# Altium PCB PCB_V1.0.PcbDoc (part 2 of 3)
Units mil, origin at the board's own origin, x right, y up, seen from the top; angles counter-clockwise.
Board outline 2770.03 x 1450.03 mil, 4 copper layers (Layer 1(SIG), Layer 2(GND), Layer 3(GND), Layer 4(SIG)), stack 61.581 mil thick; 51 components, 42 nets, 232 pads, 371 vias.
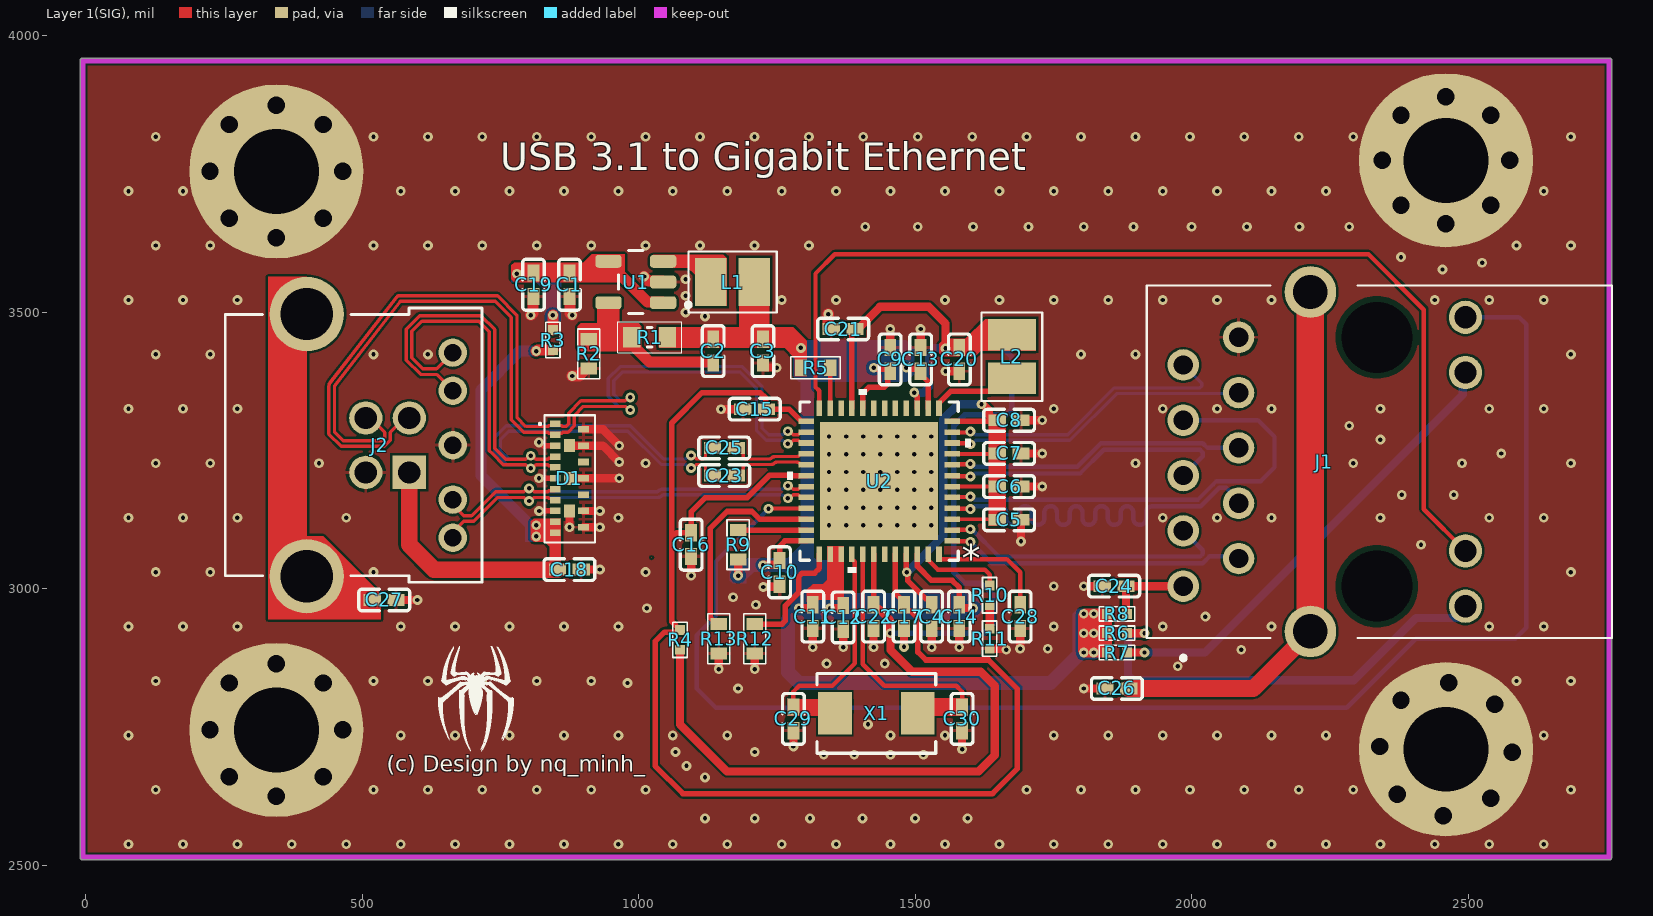
[diagram p0: Layer 1(SIG) view]

## Part data (continued)
R1: library part R0603_53.6kΩ_±0.5%, "Fixed Resistor, Thin Film, 0.1W, 53600ohm, 75V, 0.5% +/-Tol, 50ppm/Cel, Surface Mount, 0603", Case Code (Imperial)=0603, LCSC Part=C863153, Manufacturer="Yageo Group", Manufacturer Part Number=RT0603DRE0753K6L, Max Operating Temperature=155°C, Max Power Dissipation=100mW, Min Operating Temperature=-55°C, Supplier Part Number=311-2618-1-ND, Temperature Coefficient=50ppm/°C, Tolerance=0.5%, Voltage Rating=75V, Voltage Rating (DC)=50V, Case/Package=0603, Category="Chip SMD Resistors", China RoHS=Non-Compliant, ComponentLink1Description=https://datasheet.octopart.com:443/RT0603DRE0753K6L-Yageo-datasheet-176402239.pdf?src-supplier=Future+Electronics, ComponentLink1URL=https://datasheet.octopart.com:443/RT0603DRE0753K6L-Yageo-datasheet-176402239.pdf?src-supplier=Future+Electronics, ComponentLink2Description=https://datasheet.octopart.com:443/RT0603DRE0753K6L-Yageo-datasheet-169971040.pdf?src-supplier=Future+Electronics, ComponentLink2URL=https://datasheet.octopart.com:443/RT0603DRE0753K6L-Yageo-datasheet-169971040.pdf?src-supplier=Future+Electronics, ComponentLink3Description=https://datasheet.octopart.com:443/RT0603DRE0753K6L-Yageo-datasheet-166250672.pdf?src-supplier=Future+Electronics, ComponentLink3URL=https://datasheet.octopart.com:443/RT0603DRE0753K6L-Yageo-datasheet-166250672.pdf?src-supplier=Future+Electronics, ComponentLink4Description=https://datasheet.octopart.com:443/RT0603DRE0753K6L-Yageo-datasheet-136673517.pdf?src-supplier=Future+Electronics, ComponentLink4URL=https://datasheet.octopart.com:443/RT0603DRE0753K6L-Yageo-datasheet-136673517.pdf?src-supplier=Future+Electronics, ComponentLink5Description=https://datasheet.octopart.com:443/RT0603DRE0753K6L-Yageo-datasheet-137700930.pdf?src-supplier=Future+Electronics, ComponentLink5URL=https://datasheet.octopart.com:443/RT0603DRE0753K6L-Yageo-datasheet-137700930.pdf?src-supplier=Future+Electronics, ComponentLink6Description=https://datasheet.octopart.com:443/RT0603DRE0753K6L-Yageo-datasheet-96443642.pdf?src-supplier=Upverter, ComponentLink6URL=https://datasheet.octopart.com:443/RT0603DRE0753K6L-Yageo-datasheet-96443642.pdf?src-supplier=Upverter, ComponentLink7Description=https://datasheet.octopart.com/RT0603DRE0753K6L-Yageo-datasheet-86813807.pdf, ComponentLink7URL=https://datasheet.octopart.com/RT0603DRE0753K6L-Yageo-datasheet-86813807.pdf, ComponentLink8Description=http://sigma.octopart.com:80/rohs_statement/Yageo-company-2.pdf?src-supplier=Compliance+Statements, ComponentLink8URL=http://sigma.octopart.com:80/rohs_statement/Yageo-company-2.pdf?src-supplier=Compliance+Statements, ComponentLink9Description=http://sigma.octopart.com:80/conflict_mineral_statement/Yageo-company-3.pdf?src-supplier=Compliance+Statements, ComponentLink9URL=http://sigma.octopart.com:80/conflict_mineral_statement/Yageo-company-3.pdf?src-supplier=Compliance+Statements, Composition="Thin Film", Country of Origin="Mainland China, Taiwan", Export Control Classification Number (ECCN) Code=EAR99, Features="Moisture Resistant", Harmonized Tariff Schedule (HTS) Code=8533.21.00.30, Height=450µm, Introduction Date=2008-07-11, Lead Free="Lead Free", Length=1.6mm, Lifecycle Status=Production, Mounting Technology="Surface Mount", Number of Terminals=2, Number of Terminations=2, Packaging="Tape & Reel (TR)", Power Rating=100mW, Pricing="1=0,1, 10=0,02, 25=0,0192, 50=0,018, 100=0,0171, 250=0,01584, 500=0,01496, 1000=0,01415 (USD)", REACH SVHC=Yes, RoHS=Compliant, Schedule B=8533210045, Stock=20044, Supplier=DigiKey, Width=800µm, Working Voltage=75V
R2 R5 R9 R12 R13: library part R0603_12kΩ_±1%, "100mW Thick Film Resistors 75V ±100ppm/℃ ±1% 12kΩ 0603 Chip Resistor - Surface Mount ROHS", Case Code (Imperial)=0603, Case Code (Metric)=1608, LCSC Part=C114659, Manufacturer="Yageo Group", Manufacturer Part Number=RC0603FR-0712KL, Max Operating Temperature=155°C, Max Power Dissipation=100mW, Min Operating Temperature=-55°C, Supplier Part Number=311-12.0KHRCT-ND, Temperature Coefficient=100ppm/°C, Tolerance=1%, Voltage Rating=50V, Working Voltage=75V, Case/Package=0603, Category="Chip SMD Resistors", China RoHS=Non-Compliant, ComponentLink1Description=https://datasheet.octopart.com:443/RC0603FR-0712KL-Yageo-datasheet-175887523.pdf?src-supplier=IHS, ComponentLink1URL=https://datasheet.octopart.com:443/RC0603FR-0712KL-Yageo-datasheet-175887523.pdf?src-supplier=IHS, ComponentLink2Description=https://datasheet.octopart.com:443/RC0603FR-0712KL-Yageo-datasheet-8328172.pdf?src-supplier=Newark, ComponentLink2URL=https://datasheet.octopart.com:443/RC0603FR-0712KL-Yageo-datasheet-8328172.pdf?src-supplier=Newark, ComponentLink3Description=https://datasheet.octopart.com:443/RC0603FR-0712KL-Yageo-datasheet-175423674.pdf?src-supplier=Newark, ComponentLink3URL=https://datasheet.octopart.com:443/RC0603FR-0712KL-Yageo-datasheet-175423674.pdf?src-supplier=Newark, ComponentLink4Description=https://datasheet.octopart.com:443/RC0603FR-0712KL-Yageo-datasheet-34211833.pdf?src-supplier=Newark, ComponentLink4URL=https://datasheet.octopart.com:443/RC0603FR-0712KL-Yageo-datasheet-34211833.pdf?src-supplier=Newark, ComponentLink5Description=https://datasheet.octopart.com:443/RC0603FR-0712KL-Yageo-datasheet-62067350.pdf?src-supplier=element14+APAC, ComponentLink5URL=https://datasheet.octopart.com:443/RC0603FR-0712KL-Yageo-datasheet-62067350.pdf?src-supplier=element14+APAC, ComponentLink6Description=https://datasheet.octopart.com:443/RC0603FR-0712KL-Yageo-datasheet-103092701.pdf?src-supplier=Upverter, ComponentLink6URL=https://datasheet.octopart.com:443/RC0603FR-0712KL-Yageo-datasheet-103092701.pdf?src-supplier=Upverter, ComponentLink7Description=https://datasheet.octopart.com:443/RC0603FR-0712KL-Yageo-datasheet-141435368.pdf?src-supplier=Upverter, ComponentLink7URL=https://datasheet.octopart.com:443/RC0603FR-0712KL-Yageo-datasheet-141435368.pdf?src-supplier=Upverter, ComponentLink8Description=https://datasheet.octopart.com:443/RC0603FR-0712KL-Yageo-Group-datasheet-190305687.pdf?src-supplier=Future+Electronics, ComponentLink8URL=https://datasheet.octopart.com:443/RC0603FR-0712KL-Yageo-Group-datasheet-190305687.pdf?src-supplier=Future+Electronics, ComponentLink9Description=https://datasheet.octopart.com:443/RC0603FR-0712KL-Yageo-datasheet-164759695.pdf?src-supplier=Future+Electronics, ComponentLink9URL=https://datasheet.octopart.com:443/RC0603FR-0712KL-Yageo-datasheet-164759695.pdf?src-supplier=Future+Electronics, ComponentLink10Description=https://datasheet.octopart.com:443/RC0603FR-0712KL-Yageo-datasheet-137700087.pdf?src-supplier=Future+Electronics, ComponentLink10URL=https://datasheet.octopart.com:443/RC0603FR-0712KL-Yageo-datasheet-137700087.pdf?src-supplier=Future+Electronics, ComponentLink11Description=https://datasheet.octopart.com:443/RC0603FR0712KL-Yageo-datasheet-27584510.pdf?src-supplier=Future+Electronics, ComponentLink11URL=https://datasheet.octopart.com:443/RC0603FR0712KL-Yageo-datasheet-27584510.pdf?src-supplier=Future+Electronics, ComponentLink12Description=https://datasheet.octopart.com:443/RC0603FR-0712KL-Yageo-datasheet-15599030.pdf?src-supplier=Future+Electronics, ComponentLink12URL=https://datasheet.octopart.com:443/RC0603FR-0712KL-Yageo-datasheet-15599030.pdf?src-supplier=Future+Electronics, ComponentLink13Description=https://datasheet.octopart.com:443/RC0603FR-0712KL-Yageo-datasheet-12596169.pdf?src-supplier=Future+Electronics, ComponentLink13URL=https://datasheet.octopart.com:443/RC0603FR-0712KL-Yageo-datasheet-12596169.pdf?src-supplier=Future+Electronics, ComponentLink14Description=https://datasheet.octopart.com:443/RC0603FR-0712KL-Yageo-datasheet-8324193.pdf?src-supplier=Future+Electronics, ComponentLink14URL=https://datasheet.octopart.com:443/RC0603FR-0712KL-Yageo-datasheet-8324193.pdf?src-supplier=Future+Electronics, ComponentLink15Description=https://datasheet.octopart.com:443/RC0603FR-0712KL-Yageo-Group-datasheet-189192902.pdf?src-supplier=LCSC, ComponentLink15URL=https://datasheet.octopart.com:443/RC0603FR-0712KL-Yageo-Group-datasheet-189192902.pdf?src-supplier=LCSC, ComponentLink16Description=https://datasheet.octopart.com:443/RC0603FR-0712KL-Yageo-Group-datasheet-176638170.pdf?src-supplier=Farnell, ComponentLink16URL=https://datasheet.octopart.com:443/RC0603FR-0712KL-Yageo-Group-datasheet-176638170.pdf?src-supplier=Farnell, ComponentLink17Description=https://datasheet.octopart.com/RC0603FR-0712KL-Yageo-datasheet-73766026.pdf, ComponentLink17URL=https://datasheet.octopart.com/RC0603FR-0712KL-Yageo-datasheet-73766026.pdf, ComponentLink18Description=https://datasheet.octopart.com:443/RC0603FR-0712KL-Yageo-datasheet-30459151.pdf?src-supplier=Seeed+Studio, ComponentLink18URL=https://datasheet.octopart.com:443/RC0603FR-0712KL-Yageo-datasheet-30459151.pdf?src-supplier=Seeed+Studio, ComponentLink19Description=https://datasheet.octopart.com:443/RC0603FR-0712KL-Yageo-datasheet-118562.pdf?src-supplier=DigiKey, ComponentLink19URL=https://datasheet.octopart.com:443/RC0603FR-0712KL-Yageo-datasheet-118562.pdf?src-supplier=DigiKey, ComponentLink20Description=http://sigma.octopart.com:80/conflict_mineral_statement/Yageo-company-3.pdf?src-supplier=Compliance+Statements, ComponentLink20URL=http://sigma.octopart.com:80/conflict_mineral_statement/Yageo-company-3.pdf?src-supplier=Compliance+Statements, ComponentLink21Description=http://sigma.octopart.com:80/rohs_statement/Yageo-company-2.pdf?src-supplier=Compliance+Statements, ComponentLink21URL=http://sigma.octopart.com:80/rohs_statement/Yageo-company-2.pdf?src-supplier=Compliance+Statements, Composition="Thick Film", Depth=800µm, Features="Moisture Resistant", Height=450µm, Lead Free="Lead Free", Length=1.6mm, Lifecycle Status=Production, Military Standard=Not, Mounting Technology="Surface Mount", Number of Terminals=2, Number of Terminations=2, Packaging="Tape and Reel", Pins=2, Power Rating=100mW, Pricing="1=0,1, 10=0,025, 25=0,0188, 50=0,015, 100=0,0122, 250=0,0094, 500=0,00782, 1000=0,00661 (USD)", REACH SVHC=Yes, RoHS=Compliant, Schedule B="8533210045, 8533210045|8533210045|8533210045|8533210045|8533210045", Stock=279862, Supplier=DigiKey, Termination=SMD/SMT, Voltage Rating (DC)=50V, Width=800µm
R3 R4 R8: library part RC0402JR-070RL, "GENERAL PURPOSE CHIP RESISTOR Metal Glaze/thick Film, 0.0625W, 0ohm, Surface Mount, 0402", Case Code (Imperial)=0402, LCSC Part=C60485, Manufacturer="Yageo Group", Max Operating Temperature=155°C, Max Power Dissipation=63mW, Min Operating Temperature=-55°C, Power Rating=62.5mW, Supplier Part Number=311-0.0JRDKR-ND, Temperature Coefficient=200ppm/°C, Tolerance=5%, Voltage Rating=50V, Case/Package=0402, Category="Chip SMD Resistors", China RoHS=Non-Compliant, ComponentLink1Description=https://datasheet.octopart.com:443/RC0402JR-070RL-Yageo-datasheet-182189538.pdf?src-supplier=IHS, ComponentLink1URL=https://datasheet.octopart.com:443/RC0402JR-070RL-Yageo-datasheet-182189538.pdf?src-supplier=IHS, ComponentLink2Description=https://datasheet.octopart.com:443/RC0402JR-070RL-Yageo-datasheet-10408619.pdf?src-supplier=Newark, ComponentLink2URL=https://datasheet.octopart.com:443/RC0402JR-070RL-Yageo-datasheet-10408619.pdf?src-supplier=Newark, ComponentLink3Description=https://datasheet.octopart.com:443/RC0402JR-070RL-Yageo-Group-datasheet-181964826.pdf?src-supplier=Newark, ComponentLink3URL=https://datasheet.octopart.com:443/RC0402JR-070RL-Yageo-Group-datasheet-181964826.pdf?src-supplier=Newark, ComponentLink4Description=https://datasheet.octopart.com:443/RC0402JR-070RL-Yageo-Group-datasheet-190305687.pdf?src-supplier=Future+Electronics, ComponentLink4URL=https://datasheet.octopart.com:443/RC0402JR-070RL-Yageo-Group-datasheet-190305687.pdf?src-supplier=Future+Electronics, ComponentLink5Description=https://datasheet.octopart.com:443/RC0402JR-070RL-Yageo-datasheet-164759695.pdf?src-supplier=Future+Electronics, ComponentLink5URL=https://datasheet.octopart.com:443/RC0402JR-070RL-Yageo-datasheet-164759695.pdf?src-supplier=Future+Electronics, ComponentLink6Description=https://datasheet.octopart.com:443/RC0402JR-070RL-Yageo-datasheet-137700087.pdf?src-supplier=Future+Electronics, ComponentLink6URL=https://datasheet.octopart.com:443/RC0402JR-070RL-Yageo-datasheet-137700087.pdf?src-supplier=Future+Electronics, ComponentLink7Description=https://datasheet.octopart.com:443/RC0402JR-070RL-Yageo-datasheet-12531192.pdf?src-supplier=Seeed+Studio, ComponentLink7URL=https://datasheet.octopart.com:443/RC0402JR-070RL-Yageo-datasheet-12531192.pdf?src-supplier=Seeed+Studio, ComponentLink8Description=https://datasheet.octopart.com:443/RC0402JR-070RL-Yageo-datasheet-8324527.pdf?src-supplier=TME, ComponentLink8URL=https://datasheet.octopart.com:443/RC0402JR-070RL-Yageo-datasheet-8324527.pdf?src-supplier=TME, ComponentLink9Description=https://datasheet.octopart.com:443/RC0402JR-070RL-Yageo-datasheet-62067350.pdf?src-supplier=Farnell, ComponentLink9URL=https://datasheet.octopart.com:443/RC0402JR-070RL-Yageo-datasheet-62067350.pdf?src-supplier=Farnell, ComponentLink10Description=https://datasheet.octopart.com:443/RC0402JR-070RL-Yageo-datasheet-8329306.pdf?src-supplier=element14, ComponentLink10URL=https://datasheet.octopart.com:443/RC0402JR-070RL-Yageo-datasheet-8329306.pdf?src-supplier=element14, ComponentLink11Description=https://datasheet.octopart.com:443/RC0402JR-070RL-Yageo-datasheet-505231.pdf?src-supplier=element14, ComponentLink11URL=https://datasheet.octopart.com:443/RC0402JR-070RL-Yageo-datasheet-505231.pdf?src-supplier=element14, ComponentLink12Description=https://datasheet.octopart.com:443/RC0402JR-070RL-Yageo-datasheet-175423674.pdf?src-supplier=SOS+electronic, ComponentLink12URL=https://datasheet.octopart.com:443/RC0402JR-070RL-Yageo-datasheet-175423674.pdf?src-supplier=SOS+electronic, ComponentLink13Description=https://datasheet.octopart.com/RC0402JR-070RL-Yageo-datasheet-73766026.pdf, ComponentLink13URL=https://datasheet.octopart.com/RC0402JR-070RL-Yageo-datasheet-73766026.pdf, ComponentLink14Description=http://sigma.octopart.com:80/conflict_mineral_statement/Yageo-company-3.pdf?src-supplier=Compliance+Statements, ComponentLink14URL=http://sigma.octopart.com:80/conflict_mineral_statement/Yageo-company-3.pdf?src-supplier=Compliance+Statements, ComponentLink15Description=http://sigma.octopart.com:80/rohs_statement/Yageo-company-2.pdf?src-supplier=Compliance+Statements, ComponentLink15URL=http://sigma.octopart.com:80/rohs_statement/Yageo-company-2.pdf?src-supplier=Compliance+Statements, Composition="Thick Film", Contact Plating=Tin, Depth=500µm, Features="Moisture Resistant", Height=350µm, Lead Free="Lead Free", Length=1mm, Lifecycle Status=Production, Manufacturer Part Number=RC0402JR-070RL, Military Standard=Not, Mounting Technology="Surface Mount", Number of Terminals=2, Number of Terminations=2, Packaging="Tape & Reel", Pins=2, Pricing="1=0,1, 10=0,010, 25=0,0064, 50=0,0056, 100=0,0048, 250=0,00404, 500=0,00356, 1000=0,00313, 5000=0,00237 (USD)", Radiation Hardening=No, REACH SVHC=Yes, RoHS=Compliant, Schedule B="8533290000, 8533290000|8533290000, 8533290000|8533290000|8533290000, 8533290000|8533290000|8533290000|8533290000", Stock=16568824, Supplier=DigiKey, Termination=SMD/SMT, Voltage Rating (DC)=50V, Width=500µm
R6 R7 R10 R11: library part R0402_1kΩ_0.1%, "RES SMD 1K OHM 0.1% 1/16W 0402 / 1 kOhms ±0.1% 0.063W, 1/16W Chip Resistor 0402 (1005 Metric) Thin Film", Case Code (Imperial)=0402, LCSC Part=C852624, Manufacturer="Yageo Group", Manufacturer Part Number=RT0402BRD071KL, Max Operating Temperature=155°C, Max Power Dissipation=63mW, Min Operating Temperature=-55°C, Power Rating=62.5mW, Supplier Part Number=YAG1386CT-ND, Temperature Coefficient=25ppm/°C, Tolerance=0.1%, Voltage Rating=50V, Case/Package=0402, Category="Chip SMD Resistors", China RoHS=Non-Compliant, ComponentLink1Description=https://datasheet.octopart.com:443/RT0402BRD071KL-Yageo-datasheet-176402239.pdf?src-supplier=Future+Electronics, ComponentLink1URL=https://datasheet.octopart.com:443/RT0402BRD071KL-Yageo-datasheet-176402239.pdf?src-supplier=Future+Electronics, ComponentLink2Description=https://datasheet.octopart.com:443/RT0402BRD071KL-Yageo-datasheet-169971040.pdf?src-supplier=Future+Electronics, ComponentLink2URL=https://datasheet.octopart.com:443/RT0402BRD071KL-Yageo-datasheet-169971040.pdf?src-supplier=Future+Electronics, ComponentLink3Description=https://datasheet.octopart.com:443/RT0402BRD071KL-Yageo-datasheet-166250672.pdf?src-supplier=Future+Electronics, ComponentLink3URL=https://datasheet.octopart.com:443/RT0402BRD071KL-Yageo-datasheet-166250672.pdf?src-supplier=Future+Electronics, ComponentLink4Description=https://datasheet.octopart.com:443/RT0402BRD071KL-Yageo-datasheet-136673517.pdf?src-supplier=Future+Electronics, ComponentLink4URL=https://datasheet.octopart.com:443/RT0402BRD071KL-Yageo-datasheet-136673517.pdf?src-supplier=Future+Electronics, ComponentLink5Description=https://datasheet.octopart.com:443/RT0402BRD071KL-Yageo-datasheet-137700930.pdf?src-supplier=Future+Electronics, ComponentLink5URL=https://datasheet.octopart.com:443/RT0402BRD071KL-Yageo-datasheet-137700930.pdf?src-supplier=Future+Electronics, ComponentLink6Description=https://datasheet.octopart.com:443/RT0402BRD071KL-Yageo-datasheet-96443642.pdf?src-supplier=Future+Electronics, ComponentLink6URL=https://datasheet.octopart.com:443/RT0402BRD071KL-Yageo-datasheet-96443642.pdf?src-supplier=Future+Electronics, ComponentLink7Description=https://datasheet.octopart.com:443/RT0402BRD071KL-Yageo-datasheet-12594463.pdf?src-supplier=Future+Electronics, ComponentLink7URL=https://datasheet.octopart.com:443/RT0402BRD071KL-Yageo-datasheet-12594463.pdf?src-supplier=Future+Electronics, ComponentLink8Description=https://datasheet.octopart.com:443/RT0402BRD071KL-Yageo-datasheet-8324589.pdf?src-supplier=Future+Electronics, ComponentLink8URL=https://datasheet.octopart.com:443/RT0402BRD071KL-Yageo-datasheet-8324589.pdf?src-supplier=Future+Electronics, ComponentLink9Description=https://datasheet.octopart.com:443/RT0402BRD071KL-Yageo-datasheet-34924148.pdf?src-supplier=Future+Electronics, ComponentLink9URL=https://datasheet.octopart.com:443/RT0402BRD071KL-Yageo-datasheet-34924148.pdf?src-supplier=Future+Electronics, ComponentLink10Description=https://datasheet.octopart.com:443/RT0402BRD071KL-Yageo-datasheet-141265893.pdf?src-supplier=ODG+(Origin+Data+Global), ComponentLink10URL=https://datasheet.octopart.com:443/RT0402BRD071KL-Yageo-datasheet-141265893.pdf?src-supplier=ODG+(Origin+Data+Global), ComponentLink11Description=https://sigma.octopart.com:443/138820526/technical_drawing/Yageo-RT0402BRD071KL.pdf?src-supplier=Upverter, ComponentLink11URL=https://sigma.octopart.com:443/138820526/technical_drawing/Yageo-RT0402BRD071KL.pdf?src-supplier=Upverter, ComponentLink12Description=https://datasheet.octopart.com:443/RT0402BRD071KL-Yageo-datasheet-10915759.pdf?src-supplier=TME, ComponentLink12URL=https://datasheet.octopart.com:443/RT0402BRD071KL-Yageo-datasheet-10915759.pdf?src-supplier=TME, ComponentLink13Description=https://datasheet.octopart.com:443/RT0402BRD071KL-Yageo-datasheet-164439670.pdf?src-supplier=Newark, ComponentLink13URL=https://datasheet.octopart.com:443/RT0402BRD071KL-Yageo-datasheet-164439670.pdf?src-supplier=Newark, ComponentLink14Description=https://datasheet.octopart.com:443/RT0402BRD071KL-Yageo-datasheet-120102479.pdf?src-supplier=Megastar, ComponentLink14URL=https://datasheet.octopart.com:443/RT0402BRD071KL-Yageo-datasheet-120102479.pdf?src-supplier=Megastar, ComponentLink15Description=https://datasheet.octopart.com/RT0402BRD071KL-Yageo-datasheet-86813807.pdf, ComponentLink15URL=https://datasheet.octopart.com/RT0402BRD071KL-Yageo-datasheet-86813807.pdf, ComponentLink16Description=http://sigma.octopart.com:80/conflict_mineral_statement/Yageo-company-3.pdf?src-supplier=Compliance+Statements, ComponentLink16URL=http://sigma.octopart.com:80/conflict_mineral_statement/Yageo-company-3.pdf?src-supplier=Compliance+Statements, ComponentLink17Description=http://sigma.octopart.com:80/rohs_statement/Yageo-company-2.pdf?src-supplier=Compliance+Statements, ComponentLink17URL=http://sigma.octopart.com:80/rohs_statement/Yageo-company-2.pdf?src-supplier=Compliance+Statements, Composition="Thin Film", Depth=500µm, Features="Moisture Resistant", Height=300µm, Lead Free="Lead Free", Length=1mm, Lifecycle Status=Production, Military Standard=Not, Mounting Technology="Surface Mount", Number of Terminals=2, Number of Terminations=2, Pricing="1=0,1, 10=0,078, 25=0,0724, 50=0,0684, 100=0,0646, 250=0,05992, 500=0,05672, 1000=0,05377, 5000=0,04796 (USD)", REACH SVHC=Yes, RoHS=Compliant, Schedule B="8533210045, 8533210045|8533210045|8533210045|8533210045|8533210045|8533210045|8533210045|8533210045|8533210045|8533210045|8533210045|8533210045|8533210045, 8533210045|8533210045|8533210045|8533210045|8533210045|8533210045|8533210045|8533210045|8533210045|8533210045|8533210045|8533210045|8533210045|8533210045, 8533210045|8533210045|8533210045|8533210045|8533210045|8533210045|8533210045|8533210045|8533210045|8533210045|8533210045|8533210045|8533210045|8533210045|8533210045", Stock=101139, Supplier=DigiKey, Termination=SMD/SMT, Voltage Rating (DC)=50V, Weight=652.039032µg, Width=500µm, Working Voltage=50V
U1: "ROHS3Compliant Adjustable Positive DUAL Switching Regulator IC -40C~125C TJ 1.5MHz 1A 1.6mm", Case/Package=SOT-23, LCSC Part=C163219, Manufacturer="Texas Instruments", Manufacturer Lifecycle Status=ACTIVE, Max Junction Temperature (Tj)=125°C, Max Supply Voltage=5.5V, Min Operating Temperature=-40°C, Min Supply Voltage=2.5V, Nominal Supply Current=35µA, Output Current=1A, Supplier Part Number=296-47359-1-ND, Switching Frequency=1.5MHz, Category="Voltage Regulators - Switching", ComponentLink1Description=https://sigma.octopart.com:443/177332311/technical_drawing/Texas-Instruments-TLV62568DBVR.pdf?src-supplier=Texas+Instruments, ComponentLink1URL=https://sigma.octopart.com:443/177332311/technical_drawing/Texas-Instruments-TLV62568DBVR.pdf?src-supplier=Texas+Instruments, ComponentLink2Description=https://octopart.com:443/opatz8j6/c1?t=vPHbBTZync03nc36PRH4evl9f9XS3pRQdSmbiysQsMfDLG0HXrdI_A5Kjl8OaFtSQD0YLbQeJgMP-_JQaVrb-4MwD9lWSaxscQNQWteh7Ox_BwG2tlOEVzeoiAwU9PQpDczjkd1NvrO29_tBD_-kASWfwXWMSSZbSn8J3ugEkJYM36bt8V1c5ce8ivLbuwT9JHlDmiS_2qQgvZdWgloT7CjqD7HxfNGaoxnW2-1KbVj-rghSNpHCP-x5DM5iAr4G7eP6joer0wBZ-Um1XcgZjkJuH9ew8i6R7p-JMymC5vPEZUbQvtDFT-Y1ZDIuA0Iyj9w-1LHecovXeRxQwQ6BdQFRy4KrXcWI-2UEDx3VIn_4HQ_sDR11ymwJEK4-_c0cmN6tyAYi&src-supplier=Texas+Instruments, ComponentLink2URL=https://octopart.com:443/opatz8j6/c1?t=vPHbBTZync03nc36PRH4evl9f9XS3pRQdSmbiysQsMfDLG0HXrdI_A5Kjl8OaFtSQD0YLbQeJgMP-_JQaVrb-4MwD9lWSaxscQNQWteh7Ox_BwG2tlOEVzeoiAwU9PQpDczjkd1NvrO29_tBD_-kASWfwXWMSSZbSn8J3ugEkJYM36bt8V1c5ce8ivLbuwT9JHlDmiS_2qQgvZdWgloT7CjqD7HxfNGaoxnW2-1KbVj-rghSNpHCP-x5DM5iAr4G7eP6joer0wBZ-Um1XcgZjkJuH9ew8i6R7p-JMymC5vPEZUbQvtDFT-Y1ZDIuA0Iyj9w-1LHecovXeRxQwQ6BdQFRy4KrXcWI-2UEDx3VIn_4HQ_sDR11ymwJEK4-_c0cmN6tyAYi&src-supplier=Texas+Instruments, ComponentLink3Description=https://sigma.octopart.com:443/175570406/technical_drawing/Texas-Instruments-TLV62568DBVR.pdf?src-supplier=Texas+Instruments, ComponentLink3URL=https://sigma.octopart.com:443/175570406/technical_drawing/Texas-Instruments-TLV62568DBVR.pdf?src-supplier=Texas+Instruments, ComponentLink4Description=https://sigma.octopart.com:443/169406034/technical_drawing/Texas-Instruments-TLV62568DBVR.pdf?src-supplier=Texas+Instruments, ComponentLink4URL=https://sigma.octopart.com:443/169406034/technical_drawing/Texas-Instruments-TLV62568DBVR.pdf?src-supplier=Texas+Instruments, ComponentLink5Description=https://sigma.octopart.com:443/155939316/technical_drawing/Texas-Instruments-TLV62568DBVR.pdf?src-supplier=Texas+Instruments, ComponentLink5URL=https://sigma.octopart.com:443/155939316/technical_drawing/Texas-Instruments-TLV62568DBVR.pdf?src-supplier=Texas+Instruments, ComponentLink6Description=https://sigma.octopart.com:443/102331370/technical_drawing/Texas-Instruments-TLV62568DBVR.pdf?src-supplier=Texas+Instruments, ComponentLink6URL=https://sigma.octopart.com:443/102331370/technical_drawing/Texas-Instruments-TLV62568DBVR.pdf?src-supplier=Texas+Instruments, ComponentLink7Description=https://sigma.octopart.com:443/49249325/technical_drawing/Texas-Instruments-TLV62568DBVR.pdf?src-supplier=Texas+Instruments, ComponentLink7URL=https://sigma.octopart.com:443/49249325/technical_drawing/Texas-Instruments-TLV62568DBVR.pdf?src-supplier=Texas+Instruments, ComponentLink8Description=https://datasheet.octopart.com:443/TLV62568DBVR-Texas-Instruments-datasheet-82523182.pdf?src-supplier=Newark, ComponentLink8URL=https://datasheet.octopart.com:443/TLV62568DBVR-Texas-Instruments-datasheet-82523182.pdf?src-supplier=Newark, ComponentLink9Description=https://datasheet.octopart.com:443/TLV62568DBVR-Texas-Instruments-datasheet-137316104.pdf?src-supplier=Future+Electronics, ComponentLink9URL=https://datasheet.octopart.com:443/TLV62568DBVR-Texas-Instruments-datasheet-137316104.pdf?src-supplier=Future+Electronics, ComponentLink10Description=http://sigma.octopart.com:80/reach_statement/Texas-Instruments-company-64.pdf?src-supplier=Compliance+Statements, ComponentLink10URL=http://sigma.octopart.com:80/reach_statement/Texas-Instruments-company-64.pdf?src-supplier=Compliance+Statements, ComponentLink11Description=http://sigma.octopart.com:80/conflict_mineral_statement/Texas-Instruments-company-63.pdf?src-supplier=Compliance+Statements, ComponentLink11URL=http://sigma.octopart.com:80/conflict_mineral_statement/Texas-Instruments-company-63.pdf?src-supplier=Compliance+Statements, Height=1.45mm, Length=2.9mm, Lifecycle Status=Production, Manufacturer Part Number=TLV62568DBVR, Max Duty Cycle=100%, Max Operating Temperature=125°C, Number of Channels=1, Number of Outputs=1, Output Voltage=5.5V, Packaging="Cut Tape", Pins=5, Pricing="1=0,32, 10=0,222, 25=0,1972, 100=0,1697, 250=0,1566, 500=0,14868, 1000=0,14216 (USD)", RoHS=Compliant, Schedule B="8542390000, 8542390000|8542390000|8542390000|8542390000|8542390000", Stock=47066, Supplier=DigiKey, Thickness=1.2mm, Topology=Buck, Width=1.6mm
U2: library part LAN7800-I/Y9X, "Ethernet CTLR Single Chip 10Mbps/100Mbps/1000Mbps 1.8V/3.3V Automotive 48-Pin VQFN EP Tray", Ambient Temperature Range High=85°C, Case/Package=VQFN, LCSC Part=C633489, Manufacturer=Microchip, Manufacturer Lifecycle Status=REL, Max Supply Voltage=3.63V, Min Operating Temperature=-40°C, Min Supply Voltage=1.62V, Supplier Part Number=LAN7800-I/Y9X-ND, Category="Ethernet Controller", ComponentLink1Description=https://datasheet.octopart.com:443/LAN7800-I-Y9X-Microchip-datasheet-145017544.pdf?src-supplier=Augswan, ComponentLink1URL=https://datasheet.octopart.com:443/LAN7800-I-Y9X-Microchip-datasheet-145017544.pdf?src-supplier=Augswan, ComponentLink2Description=https://datasheet.octopart.com:443/LAN7800-I-Y9X-Microchip-datasheet-184559086.pdf?src-supplier=Microchip, ComponentLink2URL=https://datasheet.octopart.com:443/LAN7800-I-Y9X-Microchip-datasheet-184559086.pdf?src-supplier=Microchip, ComponentLink3Description=https://datasheet.octopart.com:443/LAN7800-I-Y9X-Microchip-datasheet-175858607.pdf?src-supplier=Microchip, ComponentLink3URL=https://datasheet.octopart.com:443/LAN7800-I-Y9X-Microchip-datasheet-175858607.pdf?src-supplier=Microchip, ComponentLink4Description=https://datasheet.octopart.com:443/LAN7800-I-Y9X-Microchip-datasheet-102166462.pdf?src-supplier=Newark, ComponentLink4URL=https://datasheet.octopart.com:443/LAN7800-I-Y9X-Microchip-datasheet-102166462.pdf?src-supplier=Newark, ComponentLink5Description=https://datasheet.octopart.com:443/LAN7800-I-Y9X-Microchip-datasheet-78799795.pdf?src-supplier=TME, ComponentLink5URL=https://datasheet.octopart.com:443/LAN7800-I-Y9X-Microchip-datasheet-78799795.pdf?src-supplier=TME, ComponentLink6Description=http://sigma.octopart.com:80/188454375/materials_sheet/Microchip-LAN7800-I-Y9X.pdf?src-supplier=Compliance+Statements, ComponentLink6URL=http://sigma.octopart.com:80/188454375/materials_sheet/Microchip-LAN7800-I-Y9X.pdf?src-supplier=Compliance+Statements, ComponentLink7Description=http://sigma.octopart.com:80/rohs_statement/Microchip-company-71.pdf?src-supplier=Compliance+Statements, ComponentLink7URL=http://sigma.octopart.com:80/rohs_statement/Microchip-company-71.pdf?src-supplier=Compliance+Statements, ComponentLink8Description=http://sigma.octopart.com:80/reach_statement/Microchip-company-70.pdf?src-supplier=Compliance+Statements, ComponentLink8URL=http://sigma.octopart.com:80/reach_statement/Microchip-company-70.pdf?src-supplier=Compliance+Statements, ComponentLink9Description=http://sigma.octopart.com:80/conflict_mineral_statement/Microchip-company-69.pdf?src-supplier=Compliance+Statements, ComponentLink9URL=http://sigma.octopart.com:80/conflict_mineral_statement/Microchip-company-69.pdf?src-supplier=Compliance+Statements, ComponentLink10Description=http://sigma.octopart.com:80/conflict_mineral_statement/Microchip-company-68.pdf?src-supplier=Compliance+Statements, ComponentLink10URL=http://sigma.octopart.com:80/conflict_mineral_statement/Microchip-company-68.pdf?src-supplier=Compliance+Statements, Country of Assembly="Taiwan, Thailand", Country of Fabrication=Taiwan, Country of Origin="Taiwan, Thailand", Export Control Classification Number (ECCN) Code=EAR99, Harmonized Tariff Schedule (HTS) Code=8542.39.0060, Height=1mm, HS Code=8542.39.0090, Interface="Ethernet, USB", Introduction Date=2016-10-28, Lifecycle Status=Production, Manufacturer Part Number=LAN7800-I/Y9X, Max Operating Temperature=85°C, Pins=48, Pricing="1=10,87, 25=9,04, 100=8,7375 (USD)", Projected EOL Date=2044-10-28, RoHS=Compliant, Stock=4393, Supplier=DigiKey
X1: library part ABM3-25.000MHZ-D2Y-T, "Crystal 25MHz ±20ppm (Tol) ±30ppm (Stability) 18pF FUND 30Ohm 2-Pin Mini-CSMD T/R", Case/Package=CSMD, ESR (Equivalent Series Resistance)=30Ω, Frequency=25MHz, Frequency Stability=30ppm, Frequency Tolerance=0.002%, LCSC Part=C148312, Load Capacitance=18pF, Manufacturer=Abracon, Max Operating Temperature=85°C, Min Operating Temperature=-40°C, Supplier Part Number=535-10645-1-ND, Category=Crystals, China RoHS=Non-Compliant, ComponentLink1Description=https://datasheet.octopart.com:443/ABM3-25.000MHZ-D2Y-T-Abracon-datasheet-182205007.pdf?src-supplier=JRH+Electronics, ComponentLink1URL=https://datasheet.octopart.com:443/ABM3-25.000MHZ-D2Y-T-Abracon-datasheet-182205007.pdf?src-supplier=JRH+Electronics, ComponentLink2Description=https://datasheet.octopart.com:443/ABM3-25.000MHZ-D2Y-T-Abracon-datasheet-32780515.pdf?src-supplier=element14+APAC, ComponentLink2URL=https://datasheet.octopart.com:443/ABM3-25.000MHZ-D2Y-T-Abracon-datasheet-32780515.pdf?src-supplier=element14+APAC, ComponentLink3Description=https://sigma.octopart.com:443/138895675/technical_drawing/Abracon-ABM3-25.000MHZ-D2Y-T.pdf?src-supplier=Upverter, ComponentLink3URL=https://sigma.octopart.com:443/138895675/technical_drawing/Abracon-ABM3-25.000MHZ-D2Y-T.pdf?src-supplier=Upverter, ComponentLink4Description=https://datasheet.octopart.com:443/ABM3-25.000MHZ-D2Y-T-Abracon-datasheet-13417521.pdf?src-supplier=Sager+Electronics, ComponentLink4URL=https://datasheet.octopart.com:443/ABM3-25.000MHZ-D2Y-T-Abracon-datasheet-13417521.pdf?src-supplier=Sager+Electronics, ComponentLink5Description=https://datasheet.octopart.com:443/ABM3-25.000MHZ-D2Y-T-Abracon-datasheet-8862594.pdf?src-supplier=Sager+Electronics, ComponentLink5URL=https://datasheet.octopart.com:443/ABM3-25.000MHZ-D2Y-T-Abracon-datasheet-8862594.pdf?src-supplier=Sager+Electronics, ComponentLink6Description=https://datasheet.octopart.com:443/ABM3-25.000MHZ-D2Y-T-Abracon-datasheet-8853172.pdf?src-supplier=Sager+Electronics, ComponentLink6URL=https://datasheet.octopart.com:443/ABM3-25.000MHZ-D2Y-T-Abracon-datasheet-8853172.pdf?src-supplier=Sager+Electronics, ComponentLink7Description=https://datasheet.octopart.com:443/ABM3-25.000MHZ-D2Y-T-Abracon-datasheet-8835795.pdf?src-supplier=Sager+Electronics, ComponentLink7URL=https://datasheet.octopart.com:443/ABM3-25.000MHZ-D2Y-T-Abracon-datasheet-8835795.pdf?src-supplier=Sager+Electronics, ComponentLink8Description=https://datasheet.octopart.com:443/ABM3-25.000MHZ-D2Y-T-Abracon-datasheet-8815637.pdf?src-supplier=Sager+Electronics, ComponentLink8URL=https://datasheet.octopart.com:443/ABM3-25.000MHZ-D2Y-T-Abracon-datasheet-8815637.pdf?src-supplier=Sager+Electronics, ComponentLink9Description=https://datasheet.octopart.com:443/ABM3-25.000MHZ-D2Y-T-Abracon-datasheet-8808528.pdf?src-supplier=Sager+Electronics, ComponentLink9URL=https://datasheet.octopart.com:443/ABM3-25.000MHZ-D2Y-T-Abracon-datasheet-8808528.pdf?src-supplier=Sager+Electronics, ComponentLink10Description=https://datasheet.octopart.com:443/ABM3-25.000MHZ-D2Y-T-Abracon-datasheet-8488864.pdf?src-supplier=Sager+Electronics, ComponentLink10URL=https://datasheet.octopart.com:443/ABM3-25.000MHZ-D2Y-T-Abracon-datasheet-8488864.pdf?src-supplier=Sager+Electronics, ComponentLink11Description=https://datasheet.octopart.com:443/ABM3-25.000MHZ-D2Y-T-Abracon-datasheet-8324950.pdf?src-supplier=Sager+Electronics, ComponentLink11URL=https://datasheet.octopart.com:443/ABM3-25.000MHZ-D2Y-T-Abracon-datasheet-8324950.pdf?src-supplier=Sager+Electronics, ComponentLink12Description=https://datasheet.octopart.com:443/ABM3-25.000MHZ-D2Y-T-Abracon-datasheet-577709.pdf?src-supplier=Sager+Electronics, ComponentLink12URL=https://datasheet.octopart.com:443/ABM3-25.000MHZ-D2Y-T-Abracon-datasheet-577709.pdf?src-supplier=Sager+Electronics, ComponentLink13Description=https://datasheet.octopart.com:443/ABM3-25.000MHZ-D2Y-T-Abracon-datasheet-154724144.pdf?src-supplier=Sager+Electronics, ComponentLink13URL=https://datasheet.octopart.com:443/ABM3-25.000MHZ-D2Y-T-Abracon-datasheet-154724144.pdf?src-supplier=Sager+Electronics, ComponentLink14Description=https://datasheet.octopart.com:443/ABM3-25.000MHZ-D2Y-T-Abracon-datasheet-128558652.pdf?src-supplier=X-ON, ComponentLink14URL=https://datasheet.octopart.com:443/ABM3-25.000MHZ-D2Y-T-Abracon-datasheet-128558652.pdf?src-supplier=X-ON, ComponentLink15Description=https://datasheet.octopart.com:443/ABM3-25.000MHZ-D2Y-T-Abracon-datasheet-12514944.pdf?src-supplier=Farnell, ComponentLink15URL=https://datasheet.octopart.com:443/ABM3-25.000MHZ-D2Y-T-Abracon-datasheet-12514944.pdf?src-supplier=Farnell, ComponentLink16Description=http://sigma.octopart.com:80/conflict_mineral_statement/Abracon-company-27.pdf?src-supplier=Compliance+Statements, ComponentLink16URL=http://sigma.octopart.com:80/conflict_mineral_statement/Abracon-company-27.pdf?src-supplier=Compliance+Statements, Composition=Ceramic, Depth=3.2mm, ESR=50Ω, Height=1.3mm, Lead Free="Lead Free", Length=5mm, Lifecycle Status=Production, Manufacturer Part Number=ABM3-25.000MHZ-D2Y-T, Mounting Technology="Surface Mount", Packaging="Cut Tape", Pins=2, Pricing="1=0,55, 10=0,481, 25=0,4552, 50=0,4364, 100=0,4183, 250=0,39556, 500=0,37918 (USD)", REACH SVHC=Yes, RoHS=Compliant, Schedule B="8541600060, 8541600060|8541600060|8541600060|8541600060|8541600060", Stock=14698, Supplier=DigiKey, Termination=SMD/SMT, Tolerance=0.002%, Width=3.2mm

## Free pads (board coordinates)
  round 31.5 hole 31.5 mask+4: ""(225,2745) ""(225,3755) ""(260.15,2660.15) ""(260.15,2829.85) ""(260.15,3670.15) ""(260.15,3839.85) ""(345,2625) ""(345,2865) ""(345,3635) ""(345,3875) ""(429.85,2660.15) ""(429.85,2829.85) ""(429.85,3670.15) ""(429.85,3839.85) ""(465,2745) ""(465,3755) ""(2340,2715) ""(2345,3775) ""(2371.61,2628.68) ""(2378.68,2798.39) ""(2378.68,3693.68) ""(2378.68,3856.32) ""(2455,2590) ""(2460,3660) ""(2460,3890) ""(2465,2830) ""(2541.32,2621.61) ""(2541.32,3693.68) ""(2541.32,3856.32) ""(2548.39,2791.32) ""(2575,3775) ""(2580,2705)
  round 314.96 hole 153.54 mask+4: ""(345,2745) ""(345,3755) ""(2460,2710) ""(2460,3775)

## Via types
v1: diameter 17.72, hole 7.87, Layer 1(SIG) to Layer 4(SIG), tented both sides, 371 vias

## Nets (pads, with @x,y where several pads share a name; then routed paths per layer and width w, separated by ;. In a path a pad name is that pad's centre, name@x,y a point inside that pad or via, vN(x,y) a via of type N, cw(c..) or ccw(c..) an arc to the next point about the centre after c; other vN are vias at no path point)
+1V2: C20.2 C21.1 C22.1 L2.2 R4.1 U2.15 U2.21 U2.42 | length 2781.6
  Layer 1(SIG) w8: v1(1555,3435) 1578.54,3435 C20.2
  Layer 1(SIG) w10: U2.21 1385.79,3464.37 C21.1@1391.42,3470 ; C22.1@1425.16,2971.62 U2.42 ; v1(1498.65,3355) 1498.65,3352.91 1503.9,3347.66 U2.15
  Layer 1(SIG) w15: R4.1 1075.04,2754.96 1160,2670 1615,2670 1644,2699 1644,2825 1619,2850 1495,2850 1455.52,2889.48 1455.52,2919.48 v1(1455,2920) 1454.48,2920.52 1454.48,2943.58 1434.65,2963.41 1428.13,2963.41 1425.16,2966.38 C22.1@1425.16,2971.62 ; C21.1 1396.38,3470 1436.38,3510 1525,3510 1555,3480 v1(1555,3435)
  Layer 4(SIG) w10: v1(1455,2920) 1625,2920 1640,2935 1640,2990 1620,3010 1590,3010 1570,3030 1570,3295 1590,3315 1665,3315 1675,3325 1675,3419.14 1659.14,3435 v1(1555,3435)
  Layer 4(SIG) w15: v1(1498.65,3355) 1515,3355 1525,3365 1525,3425 1535,3435 v1(1555,3435)
+1V2A: C15.1 C16.1 C17.1 R4.2 U2.25 U2.30 U2.44 | length 2512.3
  Layer 1(SIG) w10: U2.30 1278.5,3204.84 1277.81,3205.53 1237.07,3205.53 1196.54,3165 1120.63,3165 1095,3139.37 C16.1 1068.82,3101.46 1060,3092.64 ; U2.25 1294,3303.27 1272.27,3325 C15.1 1230.1,3326.35 1230.1,3344.77 1219.88,3355 1115,3355 1060,3300 1060,3092.64 ; U2.44 1464.53,2991.85 1480,2976.38 1480,2966.54 1485.63,2960.91 1490.55,2960.91 1505,2946.46 1505,2885.86 1519.36,2871.5 1632.87,2871.5 1685,2819.37 1685,2675 1640,2630 1080,2630 1030,2680 1030,2905 1047,2922 1071.04,2922 R4.2 1060,2941.04 1060,3092.64
+2V5: C4.1 C5.2 C6.2 C7.2 C8.2 U2.3 U2.6 U2.9 U2.12 U2.45 | length 861.9
  Layer 1(SIG) w7: U2.3 1647.44,3126.1 C5.2 ; U2.6 1648.38,3185.16 C6.2 ; U2.9 1647.75,3244.21 C7.2
  Layer 1(SIG) w10: U2.45 1484.21,3030.79 1486.48,3028.52 1486.48,3014.98 1519.45,2982.01 1524.37,2982.01 1530,2976.38 C4.1 ; U2.12 C8.2@1640.49,3303.27
  Layer 1(SIG) w15: v1(1620,3333.86) 1620.52,3333.34 1622.84,3333.34 1633.05,3323.13 1633.05,3315.57 1643.62,3305 C8.2
  Layer 4(SIG) w15: v1(1485,3030) 1550.84,3095.84 1550.84,3307.05 1577.65,3333.86 v1(1620,3333.86)
+3V3: C2.2 C3.2 C9.1 C10.1 C11.1 C12.1 C13.2 C14.1 L1.2 R1.2 R5.2 R6.2 R7.2 R8.2 R9.2 U2.14 U2.20 U2.36 U2.38 U2.39 U2.46 | length 2894.6
  Layer 1(SIG) w6: L1.2 L1.2@1223.11,3514.69 ; C3.2@1223.11,3464.01 C3.2
  Layer 1(SIG) w10: C10.1 1255,3077 1264.73,3086.73 U2.36 ; C11.1 1315,2976.38 1346.42,3007.8 U2.38 ; U2.39 1366.1,2973.9 C12.1 ; U2.20 1405.47,3354.14 1416.33,3365 1444.43,3365 1450.29,3370.86 1450.29,3388.83 C9.1 ; U2.46 1503.9,3041.1 1529.46,3015.54 1567,3015.54 1580,3002.54 C14.1 C14.1@1580,2968.65 ; C13.2 1510,3388.62 1523.58,3375.04 U2.14
  Layer 1(SIG) w15: v1(1180,3024.09) R9.2 ; v1(1225,3042.99) 1225.52,3043.51 1251.87,3043.51 1255,3046.64 C10.1 ; v1(1290,2965) 1290.52,2965.52 1311.87,2965.52 1315,2968.65 C11.1 ; v1(1346.42,2965) 1346.94,2965.52 1366.87,2965.52 1370,2968.65 C12.1 ; v1(1425.16,3400) 1425.68,3399.48 1451.87,3399.48 1455,3396.35 C9.1 ; v1(1484.21,3400) 1484.73,3399.48 1506.87,3399.48 1510,3396.35 C13.2 ; C14.1@1580,2968.65 1583.13,2965.52 1604.48,2965.52 v1(1605,2965)
  Layer 1(SIG) w55: 1209.37,3464.01 L1.2
  Layer 4(SIG) w25: v1(1180,3024.09) 1198.89,3042.99 v1(1225,3042.99) 1296.21,3042.99 1305,3034.2 1305,2980 v1(1290,2965) 1270,2945 1270,2850 1290,2830 1745,2830 1800,2885 v1(1822.99,2885) ; 1305,3042.99 1313.79,3042.99 ; v1(1425.16,3400) 1389.25,3435.91 ; v1(1484.21,3400) 1448.31,3435.91 1389.25,3435.91 ; v1(1605,2965) v1(1346.42,2965) 1346.42,3010.36 1313.79,3042.99 ; 1313.79,3042.99 1305,3051.77 1305,3400 1305,3424.41 v1(1293.5,3435.91) 1389.25,3435.91
  other v1: 1805,2885 1805,2920 1822.99,2920 1805,2955 1822.99,2955
+VBUS: C18.2 D1.10 D1.11 J2.1 R3.1 | length 870.1
  Layer 1(SIG) w20: v1(815,3430) 817,3432 R3.1
  Layer 1(SIG) w30: J2.1 585,3195.67 585,3080 630,3035 C18.2
  Layer 4(SIG) w20: v1(815,3115) 805,3115 715,3205 715,3360 785,3430 v1(815,3430)
  other v1: 815,3095
+VBUSF: C1.2 C19.2 R3.2 U1.1 U1.4 | length 194.3
  Layer 1(SIG) w20: v1(780,3570) 809.37,3570 810,3570.63 C19.2 ; R3.2 v1(845,3495) ; U1.4 953.54,3592.4 955.16,3590.79 955.16,3579.84 1015.79,3519.21 1042.8,3519.21 U1.1
GND: C1.1 C3.1 C4.2 C5.1 C6.1 C7.1 C8.1 C9.2 C10.2 C11.2 C12.2 C13.1 C14.2 C15.2 C16.2 C17.2 C18.1 C19.1 C20.1 C21.2 C22.2 C24.2 C26.1 C27.1 C28.2 C29.1 C30.1 D1.3 D1.6 D1.9 D1.12 D1.13 D1.15 D1.17 D1.18 D1.19 D1.20 D1.21 J1.10 J2.4 J2.7 pad. R2.1 R11.1 R12.2 R13.2 U1.2 U2.49 | length 1542.9
  Layer 1(SIG) w10: v1(820,3200) D1.6 ; v1(820,3264.96) 822.09,3264.96 827.99,3259.06 D1.3 ; v1(820.16,3141.01) D1.9@849.38,3140.98
  Layer 1(SIG) w15: C27.1 v1(600,2980) ; v1(875,3111.42) D1.21 ; D1.20 D1.15 v1(965,3200) ; D1.19 D1.17 935.47,3259.06 v1(965,3229.53) ; C18.1 v1(930,3035) ; D1.12 v1@929.98,3111.44 ; D1.13 v1(930,3140.94) ; D1.18 936.06,3288.58 965,3259.65 v1(965,3259.06) ; v1(1095,3024.09) C16.2 ; v1(1145,2855) R13.2 ; v1(1149.09,3325) C15.2 ; v1(1210,2855) R12.2 ; C3.1 1225,3403.62 1228.13,3400.49 1248.6,3400.49 1249.13,3399.96 v1(1249.86,3399.96) ; v1(1225.52,3003.37) 1226.04,3003.89 1251.87,3003.89 1255,3007.02 C10.2 ; v1(1280,2715) C29.1 ; v1(1315,2894.5) C11.2 ; v1(1370,2894.5) C12.2 ; v1(1425,2894.5) C22.2 ; C9.2 v1(1455,3470) ; v1(1480,2895.21) C17.2 ; C13.1 v1(1510,3470) ; v1(1530,2894.5) C4.2 ; v1(1555,3393.54) C20.1 ; v1(1580,2894.5) C14.2 ; v1(1585,2710) C30.1 ; R11.1 1662.26,2892 1664.26,2890 v1(1665,2890) ; v1(1690,2892) C28.2 ; v1(1691.46,3085.97) C5.1 ; C6.1 1691.54,3185.08 1729.92,3185.08 v1(1730,3185.16) ; C7.1 v1(1730,3245) ; C8.1 v1(1730,3305) ; v1(1805,2820) C26.1 ; v1(1805,3005) C24.2
  Layer 1(SIG) w20: v1(805,3495) 809.37,3499.37 809.37,3527.91 C19.1 ; C1.1 875.63,3527.91 875.63,3499.37 v1(880,3495) ; v1(880,3385) 892.5,3385 906,3398.5 R2.1 ; v1(1010,3565) 1018.39,3556.61 1042.8,3556.61 U1.2 ; v1(1342.99,3497.01) 1342.99,3470.63 1343.62,3470 C21.2
  other v1: 77.68,2538.31 176.1,2538.31 274.53,2538.31 372.95,2538.31 471.38,2538.31 569.8,2538.31 668.23,2538.31 766.65,2538.31 865.08,2538.31 963.5,2538.31 1061.93,2538.31 1160.35,2538.31 1258.78,2538.31 1357.2,2538.31 1455.63,2538.31 1554.06,2538.31 1652.48,2538.31 1750.91,2538.31 1849.33,2538.31 1947.76,2538.31 2046.18,2538.31 2144.61,2538.31 2243.03,2538.31 2341.46,2538.31 2439.88,2538.31 2538.31,2538.31 2636.73,2538.31 1120,2585 1210,2585 1310,2585 1405,2585 1500,2585 1595,2585 126.89,2636.73 520.59,2636.73 619.02,2636.73 717.44,2636.73 815.87,2636.73 914.29,2636.73 1012.72,2636.73 1701.69,2636.73 1800.12,2636.73 1898.54,2636.73 1996.97,2636.73 2095.39,2636.73 2193.82,2636.73 2292.24,2636.73 2685.95,2636.73 1120,2659.17 1086.76,2680 1335,2700 1390,2700 1455.63,2700 1515,2700 1066.75,2705 1210,2705 77.68,2735.16 569.8,2735.16 668.23,2735.16 766.65,2735.16 865.08,2735.16 963.5,2735.16 1061.93,2735.16 1160.35,2735.16 1455.63,2735.16 1554.06,2735.16 1750.91,2735.16 1849.33,2735.16 1947.76,2735.16 2046.18,2735.16 2144.61,2735.16 2243.03,2735.16 2636.73,2735.16 1415,2755 1180,2820 980,2830 126.89,2833.58 520.59,2833.58 619.02,2833.58 717.44,2833.58 815.87,2833.58 914.29,2833.58 2587.52,2833.58 2685.95,2833.58 1975,2860 1340,2865 1445,2865 2090,2890.12 1740,2892 77.68,2932.01 176.1,2932.01 274.53,2932.01 569.8,2932.01 668.23,2932.01 766.65,2932.01 865.08,2932.01 963.5,2932.01 1750.91,2932.01 1947.76,2932.01 2144.61,2932.01 2538.31,2932.01 2636.73,2932.01 2025,2950 1015,2965 1212.1,2971.25 1171.01,2985 1750.91,3005 126.89,3030.43 225.32,3030.43 520.59,3030.43 1012.72,3030.43 2685.95,3030.43 2415,3080 930,3111.46 1344.48,3115 1375.31,3115 1406.15,3115 1436.98,3115 1467.81,3115 1498.65,3115 1529.48,3115 77.68,3128.86 176.1,3128.86 274.53,3128.86 471.38,3128.86 963.5,3128.86 1947.76,3128.86 2046.18,3128.86 2144.61,3128.86 2341.46,3128.86 2538.31,3128.86 2636.73,3128.86 1344.48,3147.1 1375.31,3147.1 1406.15,3147.1 1436.98,3147.1 1467.81,3147.1 1498.65,3147.1 1529.48,3147.1 2380,3170 2473.94,3170 1344.48,3179.21 1375.31,3179.21 1406.15,3179.21 1436.98,3179.21 1467.81,3179.21 1498.65,3179.21 1529.48,3179.21 1344.48,3211.31 1375.31,3211.31 1406.15,3211.31 1436.98,3211.31 1467.81,3211.31 1498.65,3211.31 1529.48,3211.31 126.89,3227.28 225.32,3227.28 422.17,3227.28 1012.72,3227.28 1898.54,3227.28 2292.24,3227.28 2489.09,3227.28 2685.95,3227.28 1344.48,3243.42 1375.31,3243.42 1406.15,3243.42 1436.98,3243.42 1467.81,3243.42 1498.65,3243.42 1529.48,3243.42 2560,3245 2341.46,3270 1344.48,3275.52 1375.31,3275.52 1406.15,3275.52 1436.98,3275.52 1467.81,3275.52 1498.65,3275.52 1529.48,3275.52 2285,3295 77.68,3325.71 176.1,3325.71 274.53,3325.71 1750.91,3325.71 1947.76,3325.71 2046.18,3325.71 2144.61,3325.71 2341.46,3325.71 2538.31,3325.71 2636.73,3325.71 126.89,3424.13 225.32,3424.13 520.59,3424.13 619.02,3424.13 1800.12,3424.13 1898.54,3424.13 2685.95,3424.13 1120,3492.78 1085,3500 77.68,3522.56 176.1,3522.56 274.53,3522.56 1258.78,3522.56 1357.2,3522.56 1554.06,3522.56 1652.48,3522.56 1750.91,3522.56 1849.33,3522.56 1947.76,3522.56 2046.18,3522.56 2144.61,3522.56 2439.88,3522.56 2538.31,3522.56 2636.73,3522.56 1085,3530 1085,3560 2453.79,3577.5 2525.35,3590 2378.68,3600 126.89,3620.98 225.32,3620.98 520.59,3620.98 619.02,3620.98 717.44,3620.98 815.87,3620.98 914.29,3620.98 1012.72,3620.98 1111.14,3620.98 1209.57,3620.98 1307.99,3620.98 2587.52,3620.98 2685.95,3620.98 1410,3655 1505,3655 1605,3655 1705,3655 1805,3655 1895,3655 2000,3655 2100,3655 2195,3655 2285,3655 77.68,3719.41 176.1,3719.41 569.8,3719.41 668.23,3719.41 766.65,3719.41 865.08,3719.41 963.5,3719.41 1061.93,3719.41 1160.35,3719.41 1258.78,3719.41 1357.2,3719.41 1455.63,3719.41 1554.06,3719.41 1652.48,3719.41 1750.91,3719.41 1849.33,3719.41 1947.76,3719.41 2046.18,3719.41 2144.61,3719.41 2243.03,3719.41 2636.73,3719.41 126.89,3817.83 520.59,3817.83 619.02,3817.83 717.44,3817.83 815.87,3817.83 914.29,3817.83 1012.72,3817.83 1111.14,3817.83 1209.57,3817.83 1307.99,3817.83 1406.42,3817.83 1504.84,3817.83 1603.27,3817.83 1701.69,3817.83 1800.12,3817.83 1898.54,3817.83 1996.97,3817.83 2095.39,3817.83 2193.82,3817.83 2292.24,3817.83 2685.95,3817.83
GND_E: C26.2 J1.MH1 J1.MH2 | length 985
  Layer 1(SIG) w30: C26.2 2111.81,2820 J1.MH1
  Layer 1(SIG) w50: J1.MH1 J1.MH2
GND_U: C27.2 J2.S1 J2.S2 | length 639.4
  Layer 1(SIG) w30: J2.S1 400,3468.73 365,3433.73 365,3070.16 400,3035.16 J2.S2 428.27,3022.99 471.27,2980 C27.2
LED2: J1.12 U2.24 | length 1869.3
  Layer 1(SIG) w8: U2.24 1326.73,3358.27 1320,3365 1320,3570.31 1354.69,3605 2320,3605 2420,3505 2420,3144.02 J1.12
LED3: J1.14 U2.33 | length 2685.6
  Layer 1(SIG) w8: v1(1235,3145) 1235.39,3145.39 1302.61,3145.39 U2.33
  Layer 4(SIG) w8: v1(1235,3145) 1140,3050 1140,2951.19 1105,2916.19 1105,2820 1140,2785 2280.45,2785 2405.45,2910 2585,2910 2605,2930 2605,3478.37 2591.69,3491.69 2591.22,3491.22 J1.14
MDI_TR0_N: J1.3 U2.2 | length 532.1
  Layer 1(SIG) w8: U2.2 1567.76,3107.18 1599.24,3107.18 v1(1600,3107.93)
  Layer 4(SIG) w8: v1(1600,3107.93) 1602.63,3107.93 1651.89,3058.67 1860,3058.67 1930,3058.67 2015.33,3058.67 2020.01,3063.36 2020.01,3069.99 J1.3
MDI_TR0_P: J1.2 U2.1 | length 541.1
  Layer 1(SIG) w8: U2.1 1567.76,3085.97 1599.24,3085.97 v1(1600,3085.22)
  Layer 4(SIG) w8: v1(1600,3085.22) 1638.54,3046.67 1860,3046.67 1930,3046.67 2020.3,3046.67 2032.33,3058.7 2081.3,3058.7 J1.2
MDI_TR1_N: J1.7 U2.5 | length 842.6
  Layer 1(SIG) w8: U2.5 1567.76,3166.23 1599.24,3166.23 v1(1600,3166.99)
  Layer 4(SIG) w8: v1(1600,3166.99) 1602.63,3166.99 1607.99,3161.63 2011.63,3161.63 2037.97,3187.97 2045,3195 2067.37,3195 2067.57,3194.8 2113.95,3194.8 2114.15,3195 2125,3195 2150,3220 2150,3275 2120,3305 J1.7
MDI_TR1_P: J1.4 U2.4 | length 838.2
  Layer 1(SIG) w8: U2.4 1567.76,3145.03 1599.24,3145.03 v1(1600,3144.27)
  Layer 4(SIG) w8: v1(1600,3144.27) 1602.63,3144.27 1607.99,3149.63 1626.21,3149.63 1653.21,3149.63 cw(c1653.21,3138.13) 1664.71,3138.13 1664.71,3127.2 ccw(c1676.21,3127.2) 1687.71,3127.2 1687.71,3138.13 cw(c1699.21,3138.13) 1710.71,3138.13 1710.71,3127.2 ccw(c1722.21,3127.2) 1733.71,3127.2 1733.71,3138.13 cw(c1745.21,3138.13) 1756.71,3138.13 1756.71,3127.2 ccw(c1768.21,3127.2) 1779.71,3127.2 1779.71,3138.13 cw(c1791.21,3138.13) 1802.71,3138.13 1802.71,3127.2 ccw(c1814.21,3127.2) 1825.71,3127.2 1825.71,3138.13 cw(c1837.21,3138.13) 1848.71,3138.13 1848.71,3127.2 ccw(c1860.21,3127.2) 1871.71,3127.2 1871.71,3138.13 cw(c1883.21,3138.13) 1894.71,3138.13 1894.71,3127.2 ccw(c1906.21,3127.2) 1917.71,3127.2 1917.71,3138.13 cw(c1929.21,3138.13) 1929.21,3149.63 1961.28,3149.63 2016.6,3149.63 2049.97,3183 2062.4,3183 2085,3160.4 J1.4
MDI_TR2_N: J1.6 U2.8 | length 542
  Layer 1(SIG) w8: U2.8 1567.76,3225.29 1599.24,3225.29 v1(1600,3226.04)
  Layer 4(SIG) w8: v1(1600,3226.04) 1602.63,3226.04 1607.99,3220.69 1793.44,3220.69 1836.19,3263.44 2020.41,3263.44 2028.84,3255 J1.6
MDI_TR2_P: J1.5 U2.7 | length 531.9
  Layer 1(SIG) w8: U2.7 1567.76,3204.08 1599.24,3204.08 v1(1600,3203.33)
  Layer 4(SIG) w8: v1(1600,3203.33) 1602.63,3203.33 1607.99,3208.69 1798.41,3208.69 1841.16,3251.44 2015.43,3251.44 2020.12,3246.75 2020.12,3240.12 J1.5
MDI_TR3_N: J1.9 U2.11 | length 542.8
  Layer 1(SIG) w8: U2.11 1576.31,3283.58 1577,3282.89 1598.48,3282.89 v1(1600,3284.41)